# Altium PCB LDP_PWR_V2.0.PcbDoc
Units mil, origin at the board's own origin, x right, y up, seen from the top; angles counter-clockwise.
Board outline 2815 x 2985 mil, 2 copper layers (Top Layer, Bottom Layer); 91 components, 54 nets, 269 pads, 111 vias.
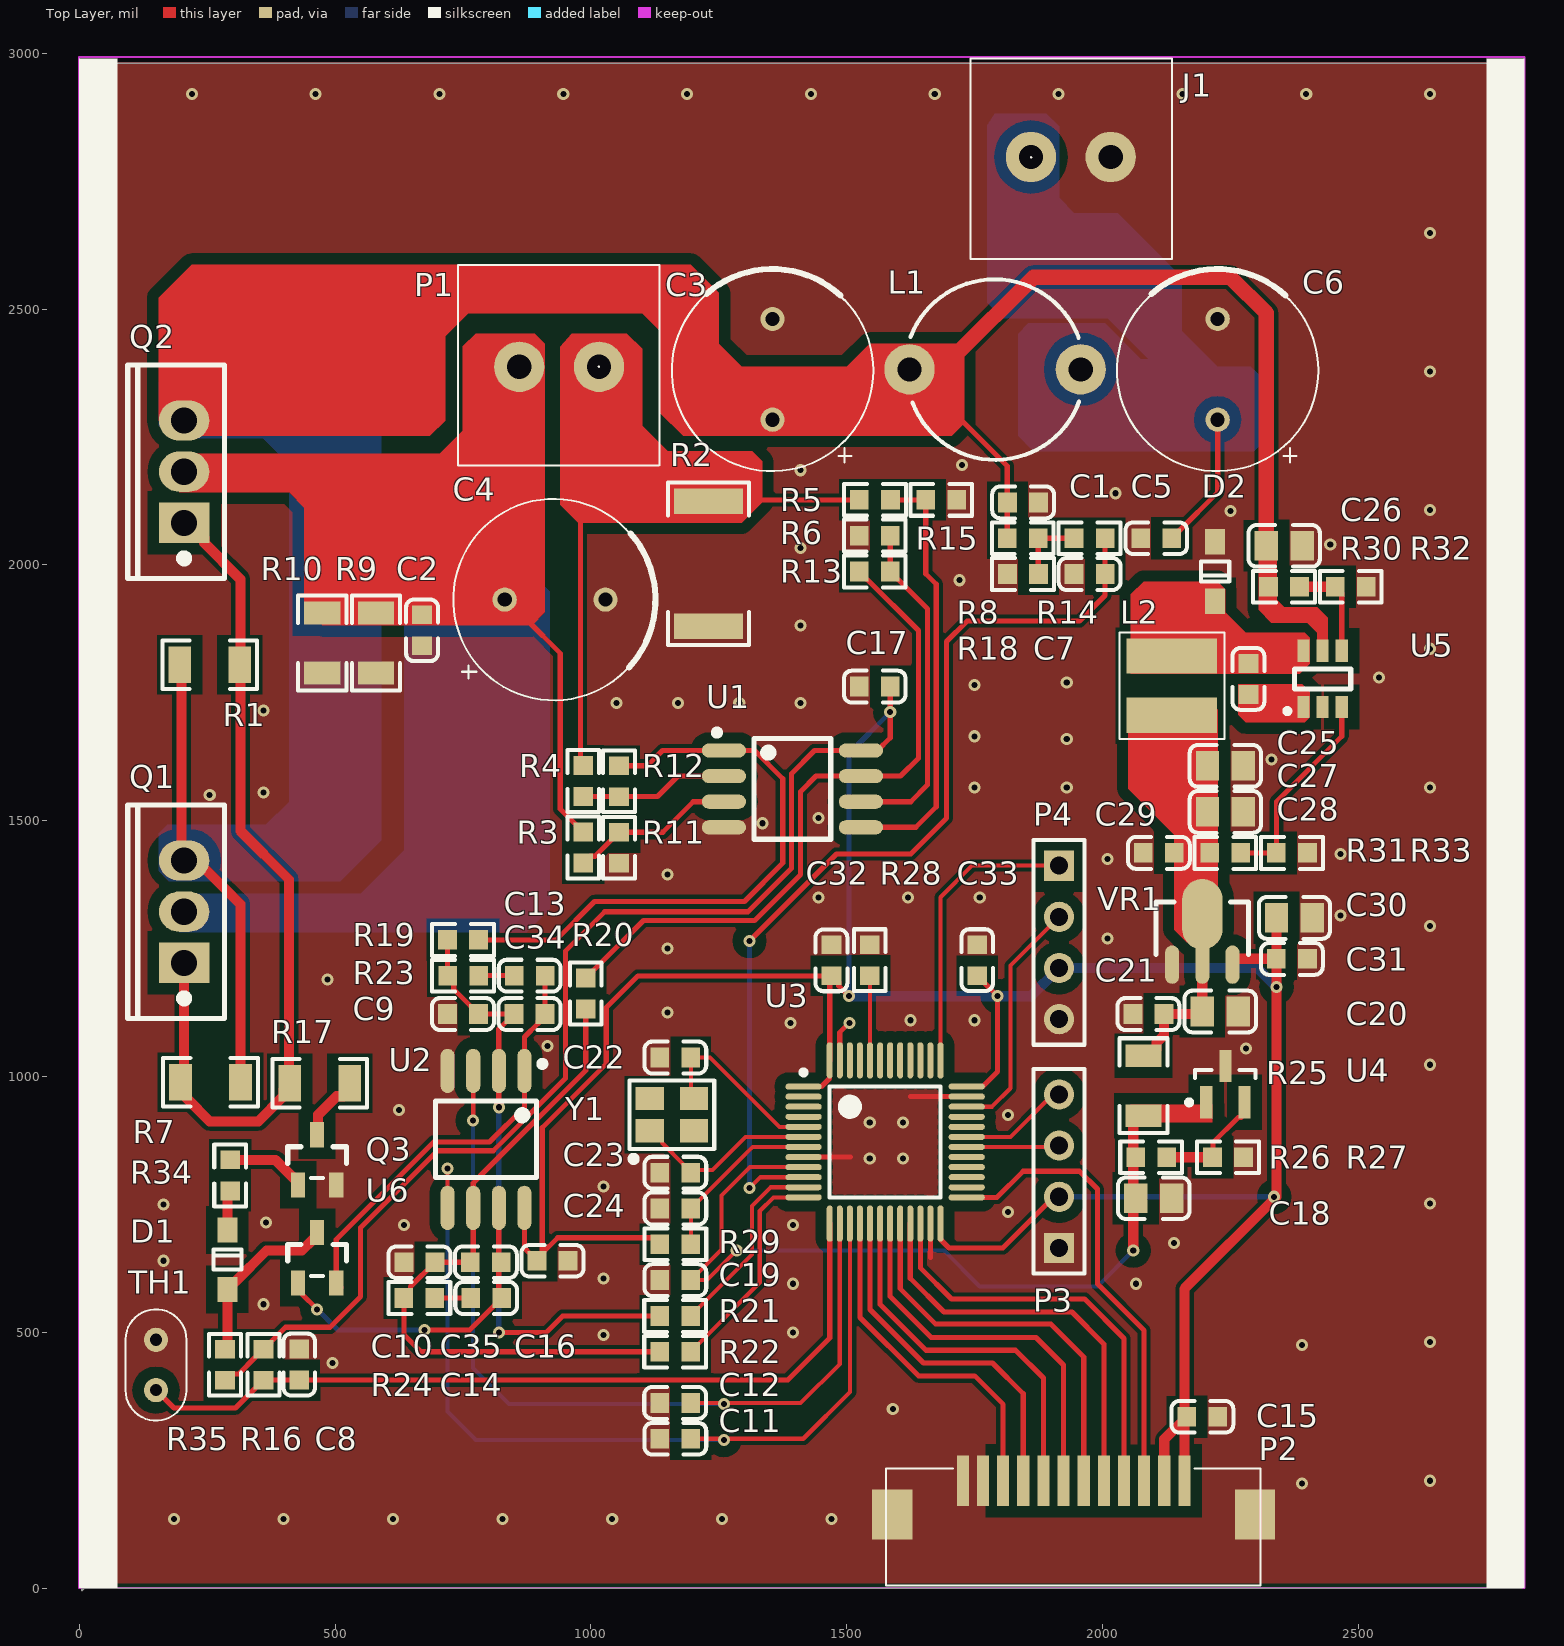
[diagram p0: Top Layer view]
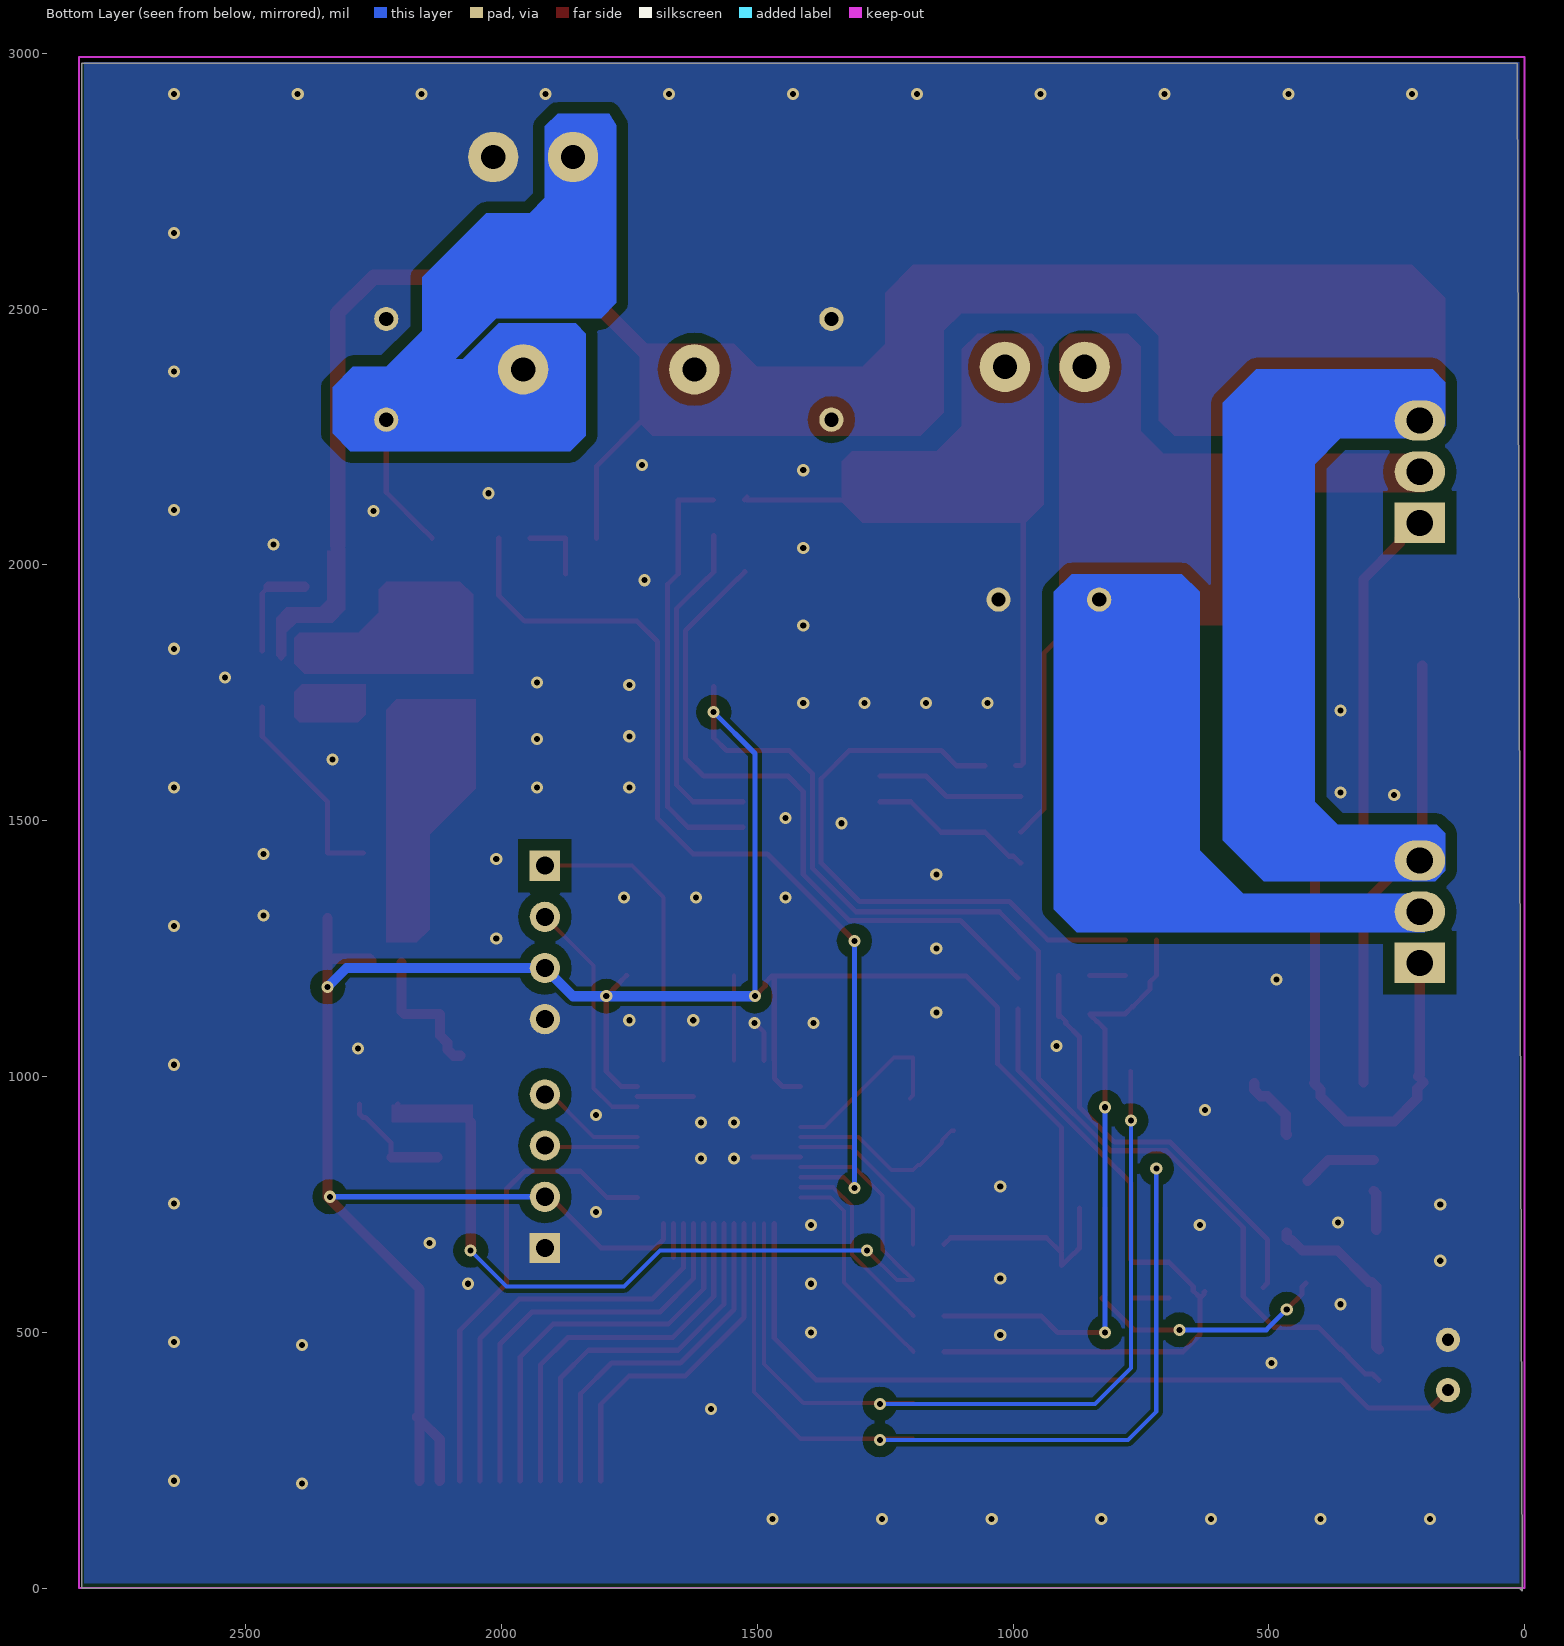
[diagram p1: Bottom Layer view, seen from below]
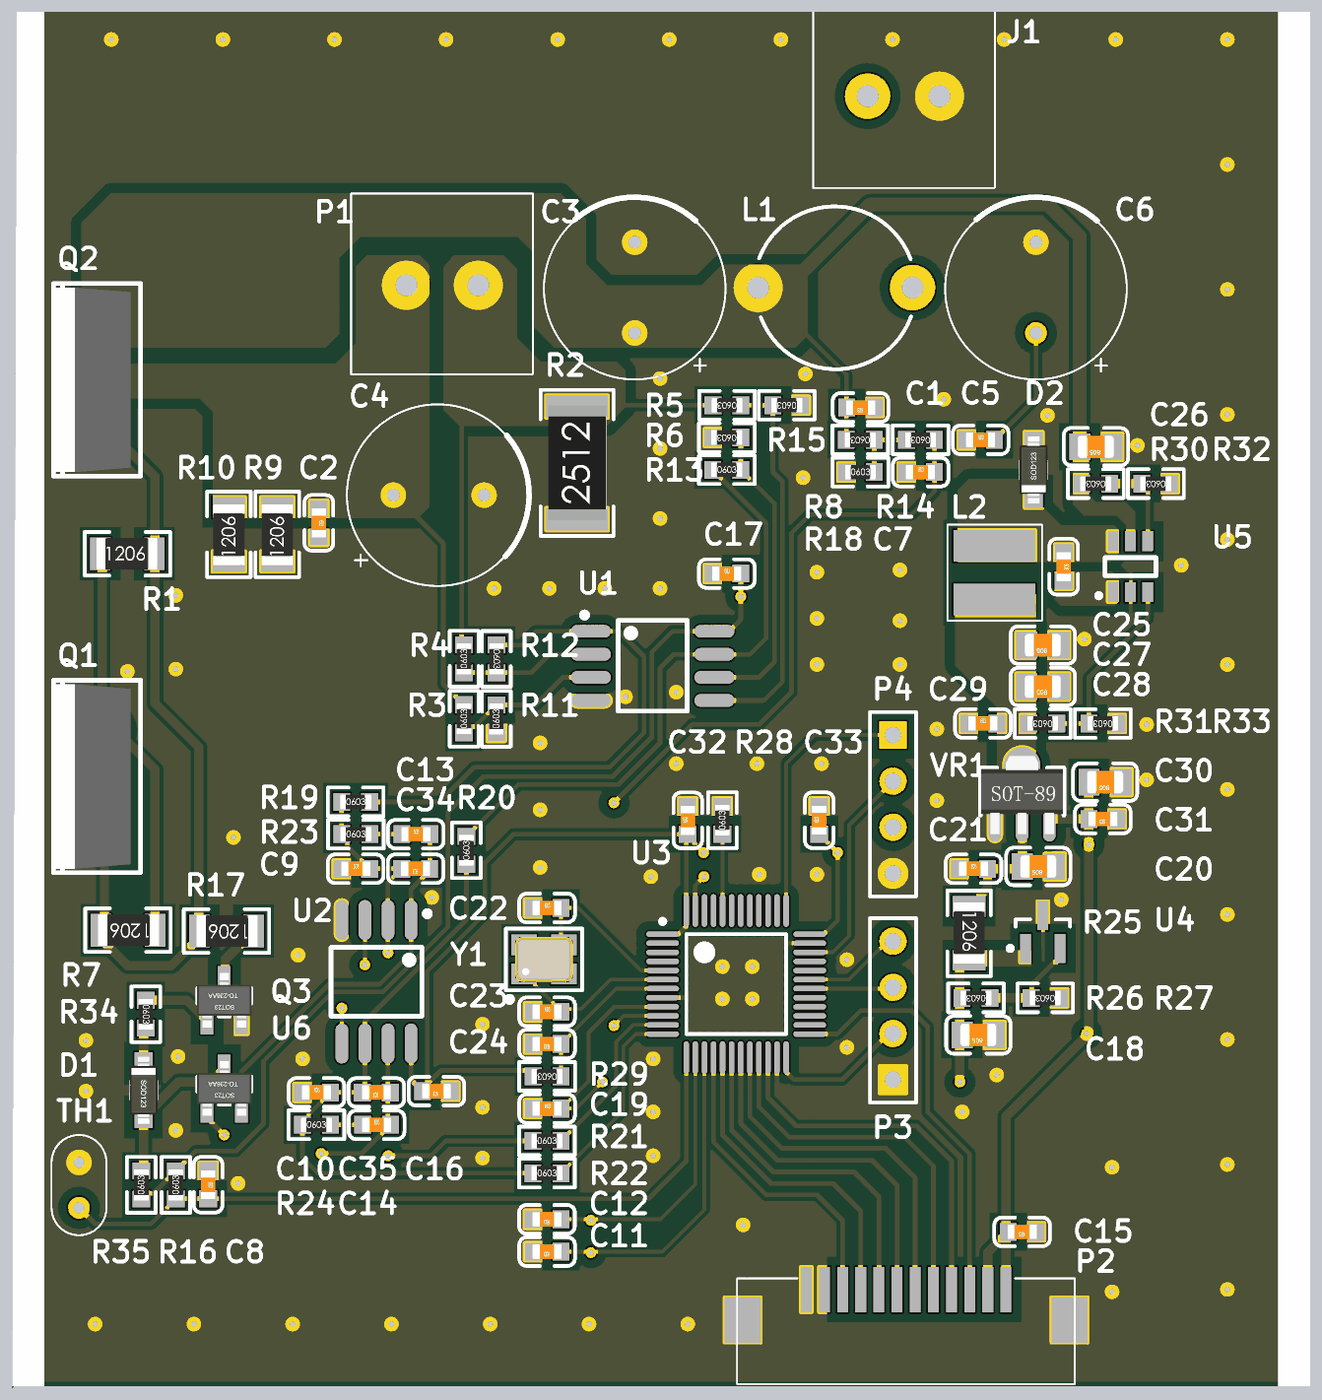
[diagram p2: 3D render of the assembled board from above, using the file's embedded part models]

## Layer stack, top to bottom
Top Solder: solder mask 0.4, Solder Resist, Dk 3.5
Top Layer: signal copper 1.4
Dielectric 1: dielectric 12.6, FR-4, Dk 4.8
Bottom Layer: signal copper 1.4
Bottom Solder: solder mask 0.4, Solder Resist, Dk 3.5

## Board outline
5,-5 10,0 2820,0 2820,2980 15,2980

## Design rules (kind name [scope] priority, off if disabled: settings)
Clearance [All] p1: gap=7 ignorepadtopadclearanceinfootprint=FALSE except(8: Arc-Fill Arc-Poly Arc-Region Track-Fill Track-Poly Track-Region; 22: SMDPad-Fill SMDPad-Poly SMDPad-Region THPad-Fill THPad-Poly THPad-Region Via-Fill Via-Poly Via-Region Fill-Fill Fill-Poly Fill-Region Poly-Poly Poly-Region Region-Region)
PlaneConnect [All] p1: planeconnectstyle=Direct reliefexpansion=20 reliefentries=4 reliefconductorwidth=10 reliefairgap=10
PolygonConnect [All] p1: connectstyle=Direct reliefconductorwidth=10 reliefentries=4 polygonreliefangle="90 Angle" airgapwidth=10
RoutingVias [All] p1: holewidth=28 width=50 viastyle="Through Hole" minholewidth=28 minwidth=50 maxholewidth=28 maxwidth=50
SolderMaskExpansion [All] p1: expansion=4
Width [All] p1: maxlimit=100 minlimit=8 preferedwidth=10 minimp=50.000000 maximp=50.000000 favimp=50.000000
29 further rules are at their usual default settings.

## Components (designator, comment, footprint, x,y, rotation, side; value= is the part's Value field where it differs from the comment)
C1 "100nF (104) 10% 50V" 0603_C 1844.69,2122.13 r180 top
C2 "10nF (103) 10% 50V" 0603_C 670,1872.13 r270 top
C3 "50V 470uF" CAP/DIP/10-5 1355,2382.13 r180 top value=220uF
C4 "50V 470uF" CAP/DIP/10-5 930,1932.13 r90 top locked value=220uF
C5 "100nF (104) 10% 50V" 0603_C 2105,2052.13 r0 top
C6 "50V 470uF" CAP/DIP/10-5 2225,2382.13 r180 top locked value=220uF
C7 "10nF (103) 10% 50V" 0603_C 1974.69,1982.13 r0 top
C8 "100nF (104) 10% 50V" 0603_C 430,437.13 r270 top
C9 "10nF (103) 10% 50V" 0603_C 750,1122.13 r0 top
C10 "10nF (103) 10% 50V" 0603_C 665,637.13 r0 top
C11 "10nF (103) 10% 50V" 0603_C 1165,292.13 r180 top
C12 "10nF (103) 10% 50V" 0603_C 1164.68,362.13 r180 top
C13 "680pF 10% 50V" 0603_C 880.32,1197.13 r0 top
C14 "6.8nF 10% 50V" 0603_C 795.32,567.13 r0 top
C15 "100nF (104) 10% 50V" 0603_C 2195,335 r180 top
C16 "100nF (104) 10% 50V" 0603_C 925,640 r180 top
C17 "100nF (104) 10% 50V" 0603_C 1554.68,1762.13 r0 top
C18 "10uF (106) 10% 25V" 0805_C 2100.04,762.13 r180 top
C19 "100nF (104) 10% 50V" 0603_C 1165,602.13 r0 top
C20 "10uF (106) 10% 25V" 0805_C 2230,1127.13 r180 top
C21 "100nF (104) 10% 50V" 0603_C 2089.69,1122.13 r0 top
C22 "12pF (120) 5% 50V" 0603_C 1165,1037.13 r0 top
C23 "12pF (120) 5% 50V" 0603_C 1165,812.13 r0 top
C24 "100nF (104) 10% 50V" 0603_C 1165,742.13 r180 top
C25 "100nF (104) 10% 50V" 0603_C 2285,1777.13 r270 top
C26 "10uF (106) 10% 25V" 0805_C 2354.96,2037.13 r180 top
C27 "10uF (106) 10% 25V" 0805_C 2240,1607.13 r180 top
C28 "10uF (106) 10% 25V" 0805_C 2240,1517.13 r180 top
C29 "100nF (104) 10% 50V" 0603_C 2110,1437.13 r0 top
C30 "10uF (106) 10% 25V" 0805_C 2375,1310 r180 top
C31 "100nF (104) 10% 50V" 0603_C 2370,1230 r180 top
C32 "100nF (104) 10% 50V" 0603_C 1470,1227.13 r90 top
C33 "100nF (104) 10% 50V" 0603_C 1755,1227.44 r90 top
C34 "1nF (102) 10% 50V" 0603_C 880,1122.13 r180 top
C35 "1nF (102) 10% 50V" 0603_C 794.68,637.13 r180 top
D1 "IN4148" SOD-123 290,642.13 r270 top
D2 "B5819W  SL" SOD-123 2220,1987.13 r90 top
J1 "OUT" CH3.96 2015.91,2797.13 r270 top
L1 "Inductor" L/DIP_6X25 1790,2382.13 r90 top locked value=10UH
L2 "10uH" "CD43 - duplicate" 2135,1822.13 r0 top
P1 "OUT" CH3.96 860,2387.13 r90 top locked
P2 "FPC12" FPC_12 1726.93,210 r270 top locked
P3 "UART1" HDR1X4 1915,665 r90 top locked
P4 "SWD" HDR1X4 1915,1412.13 r270 top locked
Q1 "IRFP9540" TO-220(TO-220-3) 205,1322.13 r90 top locked
Q2 "IRFP9540" TO-220(TO-220-3) 205,2182.13 r90 top locked
Q3 "2N7002 7002" SOT-23(SOT-23-3) 465,837.13 r270 top
R1 "10KΩ (1002) ±1%" 1206_R 255,1805 r0 top
R2 "0R05" 2512_R 1230,2002.13 r90 top locked value=0R2/1%
R3 "10KΩ (1002) ±1%" 0603_R 985,1447.44 r90 top
R4 "10KΩ (1002) ±1%" 0603_R 985,1577.44 r90 top
R5 "1KΩ (1001) ±1%" 0603_R 1555,2127.13 r180 top
R6 "1KΩ (1001) ±1%" 0603_R 1554.69,2057.13 r180 top
R7 "10KΩ (1002) ±1%" 1206_R 256.34,988.94 r180 top
R8 "10KΩ (1002) ±1%" 0603_R 1844.06,2052.13 r180 top
R9 "10KΩ (1002) ±1%" 1206_R 580,1847.13 r90 top
R10 "10KΩ (1002) ±1%" 1206_R 475,1847.13 r90 top
R11 "1KΩ (1001) ±1%" 0603_R 1055,1447.13 r90 top
R12 "1KΩ (1001) ±1%" 0603_R 1055,1577.13 r270 top
R13 "8.2KΩ (8201) ±1%" 0603_R 1554.68,1987.13 r0 top
R14 "1KΩ (1001) ±1%" 0603_R 1974.69,2052.13 r180 top
R15 "8.2KΩ (8201) ±1%" 0603_R 1684.69,2127.13 r180 top
R16 "1KΩ (1001) ±1%" 0603_R 360,436.81 r90 top
R17 "300Ω (3000) ±1%" 1206_R 470,987.13 r180 top
R18 "1KΩ (1001) ±1%" 0603_R 1844.37,1982.13 r0 top
R19 "1KΩ (1001) ±1%" 0603_R 750,1267.13 r0 top
R20 "1KΩ (1001) ±1%" 0603_R 990,1162.13 r90 top
R21 "1KΩ (1001) ±1%" 0603_R 1164.68,532.13 r0 top
R22 "1KΩ (1001) ±1%" 0603_R 1164.68,462.13 r0 top
R23 "1KΩ (1001) ±1%" 0603_R 750.31,1197.13 r0 top
R24 "1KΩ (1001) ±1%" 0603_R 664.68,567.13 r0 top
R25 "300Ω (3000) ±1%" 1206_R 2080,982.13 r270 top
R26 "3KΩ (3001) ±1%" 0603_R 2095,842.13 r180 top
R27 "9.1KΩ (9101) ±1%" 0603_R 2245,842.13 r180 top
R28 "100KΩ (1003) ±1%" 0603_R 1545,1227.44 r90 top
R29 "10KΩ (1002) ±1%" 0603_R 1165,672.13 r180 top
R30 "4.7KΩ (4701) ±1%" 0603_R 2354.69,1957.13 r180 top
R31 "5.6KΩ (5601) ±1%" 0603_R 2239.69,1437.13 r180 top
R32 "1KΩ (1001) ±1%" 0603_R 2485,1957.13 r180 top
R33 "1KΩ (1001) ±1%" 0603_R 2370,1437.13 r180 top
R34 "10Ω (10R0) ±1%" 0603_R 295,806.81 r270 top
R35 "4.7KΩ (4701) ±1%" 0603_R 285,436.81 r90 top
TH1 "NTC 10K" NTC_2.5MM 150,485.55 r0 top value=10K
U1 "SGM8582XS8G" SOIC-8_208mil 1393.86,1562.13 r270 top
U2 "SGM8582XS8G" SOIC-8_208mil 795,877.13 r180 top
U3 "STM32F071CBT6" STM-LQFP48_N 1575,872.13 r0 top locked
U4 "TL431AIDBZR" TI-DBZ3_N 2240,985 r90 top
U5 "MP2451DT-LF-Z" SOT-23-6 2430,1777.13 r270 top
U6 "BAW56" SOT-23(SOT-23-3) 465,645.79 r270 top
VR1 "HT7533-1" SOT-89(SOT-89-3) 2195,1218.7 r270 top
Y1 "8MHZ 10PPM" SMD-3225_4P 1158.31,925.63 r0 top

## Footprints (in the part's own frame and the unit in brackets; to place one, negate y for a bottom-side part, rotate by r counter-clockwise, add the part's x,y. Pads: shape width x height; smd on the part's side, far side on the other; paste and mask are expansions set on the pad)
0603_C [mm]
  rect 0.93x0.98 smd: 1(-0.77,0) 2(0.77,0)
  silkscreen extent -1.53,-0.79 1.54,0.79, body extent -0.8,-0.4 0.8,0.4, height 0.3
0603_R [mm]
  rect 0.93x0.98 smd: 1(-0.77,0) 2(0.77,0)
  silkscreen extent -1.53,-0.79 1.54,0.79, body extent -0.85,-0.4 0.85,0.4, height 0.56
0805_C [mm]
  rect 1.16x1.47 smd: 1(-0.89,0) 2(0.89,0)
  silkscreen extent -1.77,-1.04 1.77,1.04, body extent -1,-0.62 1,0.63, height 0.77
1206_R [mm]
  rect 1.13x1.8 smd: 1(-1.49,0) 2(1.49,0)
  silkscreen extent -2.36,-1.2 2.35,1.2, body extent -1.7,-0.86 1.65,0.87, height 0.85
2512_R [mm]
  rect 1.25x3.42 smd: 1(-3.1,0) 2(3.1,0)
  silkscreen extent -4.03,-2.01 4.02,2.01, body extent -3.16,-1.6 3.16,1.6, height 0.62
CAP/DIP/10-5 [mm]
  round 1.2 hole 0.7: 1(0,2.5) 2(0,-2.5)
  silkscreen extent -5,-4.98 5,5.06
"CD43 - duplicate" [mm]
  rect 4.5x1.75 smd: 1(0,0) 2(0,-2.95)
  silkscreen extent -2.59,-4.11 2.62,1.17
CH3.96 [mm]
  round 2.5 hole 1.2: 1(0,0) 2(0,-3.96)
  silkscreen extent -4.9,-6.96 5.05,3.05
FPC_12 [mm]
  rect 2.5x0.6 smd: 1(0,0) 2(0,1) 3(0,2) 4(0,3) 5(0,4) 6(0,5) 7(0,6) 8(0,7) 9(0,8) 10(0,9) 11(0,10) 12(0,11)
  rect 2.5x2 smd: 13(1.676,-3.5) 14(1.676,14.5)
  silkscreen extent -0.61,-3.81 5.21,14.78
HDR1X4 [mm] "Connector; Header; 4 Position"
  rect 1.5x1.5 hole 0.9: 1(0,0)
  round 1.5 hole 0.9: 2(2.54,0) 3(5.08,0) 4(7.62,0)
  silkscreen extent -1.27,-1.27 8.89,1.27
L/DIP_6X25 [mm]
  round 2.5 hole 1.2: 1(0,-4.25) 2(0,4.25)
  silkscreen extent -4.5,-4.17 4.47,4.2
NTC_2.5MM [mm]
  round 1.2 hole 0.6: 1(0,0) 2(0,-2.5)
  silkscreen extent -1.51,-4.01 1.51,1.51
SMD-3225_4P [mm]
  rect 1.4x1.15 smd: 1(-1.1,-0.8) 2(1.1,-0.8) 3(1.1,0.8) 4(-1.1,0.8)
  silkscreen extent -2.1,-2.35 2.1,1.7, body extent -1.6,-1.25 1.6,1.25, height 0.61
SOD-123 [mm]
  rect 1.25x1 smd: 1(1.475,0) 2(-1.475,0)
  silkscreen extent -0.5,-0.7 0.5,0.7, body extent -1.85,-0.77 1.85,0.78, height 1.35
SOIC-8_208mil [mm]
  oval 0.7x2.2 smd: 1(-1.905,-3.4) 2(-0.635,-3.4) 3(0.635,-3.4) 4(1.905,-3.4) 5(1.905,3.4) 6(0.635,3.4) 7(-0.635,3.4) 8(-1.905,3.4)
  silkscreen extent -2.95,-3.9 2.5,1.9
SOT-23(SOT-23-3) [mm]
  rect 1.25x0.7 smd: 1(1.25,-0.95) 2(1.25,0.95) 3(-1.25,0)
  silkscreen extent -0.65,-1.46 0.9,1.46, body extent -1.5,-1.5 1.5,1.5, height 1.3
SOT-23-6 [mm]
  rect 1.1x0.6 smd: 1(1.4,-0.95) 2(1.4,0) 3(1.4,0.95) 4(-1.4,0.95) 5(-1.4,0) 6(-1.4,-0.95)
  silkscreen extent -0.5,-1.87 1.72,1.4
SOT-89(SOT-89-3) [mm]
  oval 1.9x0.7 smd: 1(0,-1.5) 3(0,1.5)
  oval 3.5x2 smd: 2(-2.5,0)
  oval 2.1x0.7 smd: 2(-0.1,0)
  silkscreen extent -3.1,-2.3 -0.5,2.3, body extent -3.75,-2.25 0.55,2.25, height 1.51
STM-LQFP48_N [mm] "QFP, 48-Leads, Body 7x7mm, Pitch 0.5mm, IPC Medium Density"
  oval 1.8x0.3 smd: 1(-4.05,2.75) 2(-4.05,2.25) 3(-4.05,1.75) 4(-4.05,1.25) 5(-4.05,0.75) 6(-4.05,0.25) 7(-4.05,-0.25) 8(-4.05,-0.75) 9(-4.05,-1.25) 10(-4.05,-1.75) 11(-4.05,-2.25) 12(-4.05,-2.75) 25(4.05,-2.75) 26(4.05,-2.25) 27(4.05,-1.75) 28(4.05,-1.25) 29(4.05,-0.75) 30(4.05,-0.25) 31(4.05,0.25) 32(4.05,0.75) 33(4.05,1.25) 34(4.05,1.75) 35(4.05,2.25) 36(4.05,2.75)
  oval 0.3x1.8 smd: 13(-2.75,-4.05) 14(-2.25,-4.05) 15(-1.75,-4.05) 16(-1.25,-4.05) 17(-0.75,-4.05) 18(-0.25,-4.05) 19(0.25,-4.05) 20(0.75,-4.05) 21(1.25,-4.05) 22(1.75,-4.05) 23(2.25,-4.05) 24(2.75,-4.05) 37(2.75,4.05) 38(2.25,4.05) 39(1.75,4.05) 40(1.25,4.05) 41(0.75,4.05) 42(0.25,4.05) 43(-0.25,4.05) 44(-0.75,4.05) 45(-1.25,4.05) 46(-1.75,4.05) 47(-2.25,4.05) 48(-2.75,4.05)
  silkscreen extent -4.17,-2.75 2.75,3.57, body extent -3.5,-3.5 3.5,3.5, height 1.6
TI-DBZ3_N [mm] "SOT23, 3-Leads, Body 2.92x1.3 mm, Pitch 0.95 mm, IPC Medium Density"
  rect 1.6x0.6 smd: 1(-0.9,0.95) 2(-0.9,-0.95) 3(0.9,0)
  silkscreen extent -1.02,-1.5 0.7,1.92, body extent -0.7,-1.52 0.7,1.52, height 1.12
TO-220(TO-220-3) [mm]
  rect 2x2.5 hole 1.3: 1(-2.54,0)
  oval 2x2.5 hole 1.3: 2(0,0) 3(2.54,0)
  silkscreen extent -5.3,-2 5.3,2.8, body extent -5.08,-1.45 5.08,2.9, height 19.6

## Part data
C1 C5 C8 C15 C16 C17 C19 C21 C24 C25 C29 C31 C32 C33: library part "0603 100nF (104) 10% 50V", "贴片电容", Package=0603, SuppliersPartNumber=C14663, ComponentLink1Description=供应商, ComponentLink1URL=http://www.szlcsc.com/product/details_15331.html, Supplier=LC
C2 C7 C9 C10 C11 C12 C13 C14: library part "0603 10nF (103) 10% 50V", "贴片电容", Package=0603, SuppliersPartNumber=C57112, ComponentLink1Description=供应商, ComponentLink1URL=http://www.szlcsc.com/product/details_58143.html, Supplier=LC
C3 C4 C6: library part 07.0686, "Capacitor;400V;20%", Manufacture="Nippon Chemi-con", Manufacture_PN=EKXG401ELL470ML25S, Manufacturer={Manufacturer}, Manufacturer P/N="{Manufacturer P/N}", Package=DIP, Available_Num=67, EPR_Note=16*25脚距7., Note=47uF/400V, Out_Num=0, Part_Name=EKXG401ELL470ML25S, Part Number=07.0686, Pid=2107, Spec=Capacitor, Stock_Num=67
C18 C20 C26 C27 C28 C30: library part "0805 10uF (106) 10% 25V", "贴片电容", Package=0805, SuppliersPartNumber=C15850, ComponentLink1Description=供应商, ComponentLink1URL=http://www.szlcsc.com/product/details_16532.html, Supplier=LC
C22 C23: library part "0603 12pF (120) 5% 50V", "贴片电容", Package=0603, SuppliersPartNumber=C38523, ComponentLink1Description=供应商, ComponentLink1URL=http://www.szlcsc.com/product/details_39506.html, Supplier=LC
C34 C35: library part "0603 1nF (102) 10% 50V", "贴片电容", Package=0603, SuppliersPartNumber=C1588, ComponentLink1Description=供应商, ComponentLink1URL=http://www.szlcsc.com/product/details_1940.html, Supplier=LC
D1: library part Diode, "Default Diode", Code_JEDEC=DO-214-AB, LatestRevisionDate=17-Jul-2002, LatestRevisionNote="Re-released for DXP Platform.", PackageDescription="DO-214-AB/SMC; 2 C-Bend Leads; Body 7.9 x 5.9 mm, inc. leads (LxW)", PackageReference=SMC, PackageVersion=Sep-1996, Published=8-Jun-2000, Publisher="Altium Limited"
D2: library part "SOD-123 B5819W  SL", "肖特基二极管", Package=SOD-123, SuppliersPartNumber=C8598, ComponentLink1Description=供应商, ComponentLink1URL=http://www.szlcsc.com/product/details_9093.html, Supplier=LC
J1: library part PWR2.5, "Low Voltage Power Supply Connector", ComponentLink1Description="Manufacturer Link", ComponentLink1URL=http://domino.kycon.com/internet/Products.html, DatasheetDocument=09-May-2002, Published=17-Dec-2003, Publisher="Altium Limited"
L2: library part Inductor, "Inductor", Code_IEC=1005, Code_JEITA=0402, LatestRevisionDate=29-May-2009, LatestRevisionNote="IPC-7351 Footprint Added.", PackageDescription="Chip Inductor", PackageReference=0402-A, Published=8-Jun-2000, Publisher="Altium Limited"
P1: library part "Header 2", "Header, 2-Pin", LatestRevisionDate=17-Jul-2002, LatestRevisionNote="Re-released for DXP Platform.", Publisher="Altium Limited"
P2: library part "Header 12", "Header, 12-Pin", LatestRevisionDate=17-Jul-2002, LatestRevisionNote="Re-released for DXP Platform.", Publisher="Altium Limited"
P3 P4: library part "Header 4", "Header, 4-Pin", LatestRevisionDate=17-Jul-2002, LatestRevisionNote="Re-released for DXP Platform.", Publisher="Altium Limited"
Q1 Q2: library part MOSFET-P, "P-Channel MOSFET", LatestRevisionDate=17-Jul-2002, LatestRevisionNote="Re-released for DXP Platform.", PackageDescription="TO, Flat Index; 3 In-Line, Axial Leads; Body Dia. 4.6mm; Lead Dia. 0.5 mm (max)", PackageReference=E3, PackageVersion=1995/1996, Published=8-Jun-2000, Publisher="Altium Limited"
Q3: "MOS(场效应管)", Package=SOT-23(SOT-23-3), SuppliersPartNumber=C8545, ComponentLink1Description=供应商, ComponentLink1URL=http://www.szlcsc.com/product/details_9040.html, Supplier=LC
R1 R7 R9 R10: library part "1206 10KΩ (1002) 1%", "贴片电阻", Package=1206, SuppliersPartNumber=C17902, ComponentLink1Description=供应商, ComponentLink1URL=http://www.szlcsc.com/product/details_18590.html, Supplier=LC
R2: library part 06.0281, "Film Resistor;5%;", Manufacture_PN=0603SAJ0102T5E, Manufacturer=Yageo, Manufacturer P/N=9C06031A1203FKHFT, Package=0603, Available_Num=8849, Distributor=Digikey, Distributor P/N=311-120KHCT-ND, Out_Num=0, Part_Name=0603SAJ0102T5E, Part Number=06.0281, Pid=1965, Spec="Film Resistor", Stock_Num=8849
R3 R4 R8 R29: library part "0603 10KΩ (1002) 1%", "贴片电阻", Package=0603, SuppliersPartNumber=C25804, ComponentLink1Description=供应商, ComponentLink1URL=http://www.szlcsc.com/product/details_26547.html, Supplier=LC
R5 R6 R11 R12 R14 R16 R18 R19 R20 R21 R22 R23 R24 R32 R33: library part "0603 1KΩ (1001) 1%", "贴片电阻", Package=0603, SuppliersPartNumber=C21190, ComponentLink1Description=供应商, ComponentLink1URL=http://www.szlcsc.com/product/details_21904.html, Supplier=LC
R13 R15: library part "0603 8.2KΩ (8201) 1%", "贴片电阻", Package=0603, SuppliersPartNumber=C25981, ComponentLink1Description=供应商, ComponentLink1URL=http://www.szlcsc.com/product/details_26724.html, Supplier=LC
R17 R25: library part "1206 300Ω (3000) 1%", "贴片电阻", Package=1206, SuppliersPartNumber=C17887, ComponentLink1Description=供应商, ComponentLink1URL=http://www.szlcsc.com/product/details_18575.html, Supplier=LC
R26: library part "0603 3KΩ (3001) 1%", "贴片电阻", Package=0603, SuppliersPartNumber=C4211, ComponentLink1Description=供应商, ComponentLink1URL=http://www.szlcsc.com/product/details_4618.html, Supplier=LC
R27: library part "0603 9.1KΩ (9101) 1%", "贴片电阻", Package=0603, SuppliersPartNumber=C23260, ComponentLink1Description=供应商, ComponentLink1URL=http://www.szlcsc.com/product/details_23987.html, Supplier=LC
R28: library part "0603 100KΩ (1003) 1%", "贴片电阻", Package=0603, SuppliersPartNumber=C25803, ComponentLink1Description=供应商, ComponentLink1URL=http://www.szlcsc.com/product/details_26546.html, Supplier=LC
R30 R35: library part "0603 4.7KΩ (4701) 1%", "贴片电阻", Package=0603, SuppliersPartNumber=C23162, ComponentLink1Description=供应商, ComponentLink1URL=http://www.szlcsc.com/product/details_23889.html, Supplier=LC
R31: library part "0603 5.6KΩ (5601) 1%", "贴片电阻", Package=0603, SuppliersPartNumber=C23189, ComponentLink1Description=供应商, ComponentLink1URL=http://www.szlcsc.com/product/details_23916.html, Supplier=LC
R34: library part "0603 10Ω (10R0) 1%", "贴片电阻", Package=0603, SuppliersPartNumber=C22859, ComponentLink1Description=供应商, ComponentLink1URL=http://www.szlcsc.com/product/details_23586.html, Supplier=LC
TH1: library part Res2, "Resistor", LatestRevisionDate=17-Jul-2002, LatestRevisionNote="Re-released for DXP Platform.", PackageDescription="Axial Device, Thru-Hole; 2 Leads; 0.4 in Pin Spacing", PackageReference=AXIAL-0.4, Published=8-Jun-2000, Publisher="Altium Limited"
U1 U2: library part SGM8292XS8G, "运放", Package=SOT-23-5, SuppliersPartNumber=C7972, ComponentLink1Description=供应商, ComponentLink1URL=http://www.szlcsc.com/product/details_8449.html, Supplier=LC
U3: library part STM32F303CCT6, "ARM Cortex-M4 32-bit MCU, 256 KB Flash, 40 KB Internal RAM, 37 I/Os, 48-pin LQFP, -40 to 85 degC, Tray", I/Os (High Current)=37, Operating Frequency(F) (Processor speed) (MHz)=72, Supplier Part Number 1=497-13318-ND, Supply Voltage(Vcc) min (V)=2, ComponentLink1Description="Manufacturer URL", ComponentLink1URL=http://www.st.com/web/en/home.html, ComponentLink2Description=Datasheet, ComponentLink2URL=http://www.st.com/st-web-ui/static/active/en/resource/technical/document/datasheet/DM00058181.pdf, ComponentLink3Description="Package Specification", ComponentLink3URL=http://www.st.com/st-web-ui/static/active/en/resource/technical/document/datasheet/DM00058181.pdf, Core="ARM Cortex-M4", D/A Converter="2x12-bit (2 Channel)", DatasheetVersion="Rev. 6", FLASH Size (Prog) (kB)=256, Internal RAM Size (kB)=40, Mounting Technology="Surface Mount", PackageDescription="48-Pin Low Profile Quad Flat Package, 7 x 7 mm Body, 0.5 mm Pitch", PackageReference=LQFP48, PackageVersion="Rev. 6, 06/2013", Packing=Tray, PartNumber=STM32F303CCT6, Supplier 1=Digi-Key, Supplier 2=Newark, Supplier 3=Newark, Supplier 4=Mouser, Supplier Part Number 2=46W2192, Supplier Part Number 3=66W7286, Supplier Part Number 4=511-STM32F303CCT6
U4: "Adjustable Precision Shunt Regulator, 34 ppm / degC, 100 mA, -40 to 85 degC, 3-pin SOT-23 (DBZ), Green (RoHS & no Sb/Br)", Manufacturer="Texas Instruments", Rating=Catalog, Supplier Part Number 1=296-17329-2-ND, Temp Coeff(Max)(ppm/ degree C)=92, Temp Coeff(Typ)(ppm/ degree C)=34, Code_JEDEC=TO-236, ComponentLink1Description="Manufacturer URL", ComponentLink1URL=http://www.ti.com/, ComponentLink2Description=Datasheet, ComponentLink2URL=http://www.ti.com/general/docs/lit/getliterature.tsp?genericPartNumber=TL431A&fileType=pdf, ComponentLink3Description="Package Specification", ComponentLink3URL=http://www.ti.com/litv/pdf/mpds108a, DatasheetVersion=SLVS543M, Eco-Plan="Green (RoHS & no Sb/Br)", Initial Accuracy @ 25/deg C(%)=1, Iout/Iz(Max)(mA)=100, Min Iz for Regulation(uA)=600, Mounting Technology="Surface Mount", PackageDescription="3-Pin Plastic Small Outline, Body 2.92 x 1.3 mm, Pitch 0.95 mm", PackageReference=DBZ3, PackageVersion=4203227/B, PartNumber=TL431AIDBZR, SubFamily="Shunt Voltage Reference", Supplier 1=Digi-Key, Supplier 2=Digi-Key, Supplier 3=Digi-Key, Supplier 4=Farnell, Supplier 5=Newark, Supplier 6=Mouser, Supplier Part Number 2=296-17329-1-ND, Supplier Part Number 3=296-17329-6-ND, Supplier Part Number 4=1411108, Supplier Part Number 5=44J2371, Supplier Part Number 6=595-TL431AIDBZR, VO Adj(Max)(V)=36, VO Adj(Min)(V)=2.495
U5: library part MP2451DT-LF-Z_[C14123], "DC-DCоƬ", Package=SOT-23-6, SuppliersPartNumber=C14123, ComponentLink1Description=供应商, ComponentLink1URL=http://www.szlcsc.com/product/details_14780.html, Supplier=LC
VR1: library part "SOT-89 HT7533-1", "低压差线性稳压(LDO)", Package=SOT-89, SuppliersPartNumber=C14289, ComponentLink1Description=供应商, ComponentLink1URL=http://www.szlcsc.com/product/details_14949.html, Supplier=LC
Y1: library part "SMD-3225_4P  12MHZ 20PF 10PPM", "贴片晶振", Package=SMD-3225_4P, SuppliersPartNumber=C9002, ComponentLink1Description=供应商, ComponentLink1URL=http://www.szlcsc.com/product/details_9522.html, Supplier=LC
L1: Code_IEC=1005, Code_JEITA=0402, LatestRevisionDate=29-May-2009, LatestRevisionNote="IPC-7351 Footprint Added.", PackageDescription="Chip Inductor", PackageReference=0402-A, Published=8-Jun-2000, Publisher="Altium Limited"

## Via types
v1: diameter 23.62, hole 11.81, Top Layer to Bottom Layer, 111 vias

## Nets (pads, with @x,y where several pads share a name; then routed paths per layer and width w, separated by ;. In a path a pad name is that pad's centre, name@x,y a point inside that pad or via, vN(x,y) a via of type N, cw(c..) or ccw(c..) an arc to the next point about the centre after c; other vN are vias at no path point)
AVCC3V3: C18.2 C19.2 R25.2 R26.2 U3.9 U4.1 | length 1630.8
  Top Layer w8: v1(1285,660) 1227.13,602.13 C19.2 1195.32,603.11 1209.62,617.42 1210.61,617.42 1255,661.81 1255,767.13 1310.79,822.91 U3.9
  Top Layer w10: R25.2 R25.2@2083.27,920.2 ; U4.1@2195.79,920.2 2202.6,927.01 U4.1@2202.6,946.69
  Top Layer w20: v1(2060,660) 2060,911.22 2072.24,923.46 R25.2
  Bottom Layer w8: v1(1285,660) 1690,660 1760,590 1990,590 v1(2060,660)
BTN_ON: P2.3 U3.16 | length 683
  Top Layer w10: U3.16 1525.79,529.21 1640,415 1750,415 1805.67,359.33 P2.3
D/C: P2.9 U3.22 | length 819.8
  Top Layer w10: U3.22 1643.9,626.1 1705,565 1965,565 2041.89,488.11 P2.9
Driver_L: Q1.1 Q2.1 R1.2 R7.2 R17.2 | length 1705.8
  Top Layer w20: R7.2 209.92,976.69 209.92,957.2 254.96,912.17 350.04,912.17 399.09,961.22 399.09,974.88 R17.2@410,985.79 ; Q1.1 205,1004.45 R7.2@208.66,1000.79 ; Q2.1 214.84,2082.13 244.21,2052.76 244.21,2042.91 315,1972.13 315,1480 410,1385 R17.2@410,985.79 ; R17.2 R17.2@410,985.79
EC11_A: P2.6 U3.19 | length 763.2
  Top Layer w10: U3.19 1584.84,570.16 1665,490 1870,490 1923.78,436.22 P2.6
EC11_B: P2.5 U3.18 | length 737.4
  Top Layer w10: U3.18 1565.16,554.84 1655,465 1830,465 1884.41,410.59 P2.5
EC11_BTN: P2.4 U3.17 | length 705.8
  Top Layer w10: U3.17 1545.47,544.53 1650,440 1785,440 1845.04,379.96 P2.4
GND: C1.1 C2.2 C3.2 C4.2 C5.1 C6.2 C7.1 C8.1 C9.1 C10.1 C11.2 C12.2 C15.1 C16.1 C17.1 C18.1 C19.1 C20.1 C21.1 C22.1 C23.1 C24.2 C26.1 C27.1 C28.1 C29.1 C30.1 C31.1 C32.2 C33.2 D2.1 J1.1 P2.1 P2.2 P2.13 P2.14 P3.1 P4.4 Q3.2 R2.1 R6.2 R9.1 R10.1 R11.1 R15.1 R18.1 R27.1 R28.2 R32.1 R33.1 TH1.1 U1.4 U2.4 U3.8 U3.23 U3.35 U3.47 U4.3 U5.2 VR1.1 | length 349.6
  Top Layer w10: U3.8 1507.6,842.6 ; U3.47 1486.42,1086.42 v1(1505,1105) ; 1624.29,960.71 U3.35 ; 1663.58,646.42 U3.23
  other v1: 185,135 399.17,135 613.33,135 827.5,135 1041.67,135 1255.83,135 1470,135 2390,205 2640,210 1590,350 495,440 2390,475 2640,481 1025,495 1395,500 360,555 1395,595 2065,595 1025,605 165,640 2140,675 635,710 1395,710 365,715 1815,735 165,750 2640,752 1025,785 1545,840 1610,840 1545,910 1610,910 1815,925 625,935 2640,1023 2280,1055 915,1060 1390,1105 1625,1110 1750,1110 1150,1125 485,1190 1150,1250 2010,1270 2640,1294 2465,1315 1445,1350 1620,1350 1760,1350 1150,1395 2010,1425 2465,1435 1335,1495 1445,1505 255,1550 360,1555 1750,1565 1930,1565 2640,1565 2330,1620 1930,1660 1750,1665 360,1715 1050,1730 1170,1730 1290,1730 1410,1730 1750,1765 1930,1770 2540,1780 2640,1836 1410,1881.67 1720,1970 1410,2033.33 2445,2040 2250,2105 2640,2107 2025,2140 1410,2185 1725,2195 2640,2378 2640,2649 220,2920 462,2920 704,2920 946,2920 1188,2920 1430,2920 1672,2920 1914,2920 2156,2920 2398,2920 2640,2920
IOUT_FB: R22.2 U3.12 | length 428.1
  Top Layer w8: R22.2 1195,463.11 1209.31,477.42 1210.29,477.42 1330,597.13 1330,737.13 1356.73,763.86 U3.12
IREF: C11.1 U2.5 U3.15 | length 1849
  Top Layer w8: U2.5 720,715 v1(720,820) ; C11.1 1415,292.13 1506.1,383.23 U3.15
  Bottom Layer w8: v1(720,820) 720,345 775,290 v1(1260,290)
LCD_RST: P2.10 U3.25 | length 899
  Top Layer w10: U3.25 1793.86,763.86 1845,815 1955,815 1990,780 1990,595 2081.26,503.74 P2.10
MOSI: P2.7 U3.20 | length 783
  Top Layer w10: U3.20 1604.53,585.47 1674,516 1899,516 1963.15,451.85 P2.7
NetC2_1: C2.1 C4.1 P1.1 Q1.2 Q2.2 R3.2 R9.2 R10.2 | length 480.5
  Top Layer w10: 875,1912.13 875,1892.13 940,1827.13 940,1522.76 970.71,1492.05 970.71,1491.06 984.02,1477.76 R3.2
NetC5_2: C5.2 C6.1 J1.2 L1.1 | length 269.3
  Top Layer w10: C5.2 2135.31,2053.11 2148.62,2066.42 2149.61,2066.42 2225,2141.81 C6.1
NetC9_2: C9.2 C34.2 R19.1 R21.1 R23.1 U2.2 | length 1202.7
  Top Layer w10: R19.1 719.69,1197.44 R23.1 732.06,1185.06 732.06,1170.38 766.02,1136.42 767.01,1136.42 780.32,1123.11 C9.2 C34.2 849.68,1121.14 836.38,1107.83 835.39,1107.83 820,1092.44 U2.2 v1(820,940) ; v1(820,500) 912.87,500 945,532.13 R21.1
  Bottom Layer w10: v1(820,500) v1(820,940)
NetC10_2: C10.2 C35.2 R20.1 R22.1 R24.1 U2.6 | length 1354.7
  Top Layer w10: R24.1@625,580 626.5,578.5 626.5,575 R24.1 ; R20.1 990,1011.92 796.21,818.13 796,818.13 770,792.13 U2.6 770,642.76 C35.2 C10.2 647.68,589.49 647.68,581.42 634.37,568.11 R24.1 ; R22.1 667.87,462.13 634.37,495.63 R24.1
NetC13_1: C13.1 R23.2 | length 69.4
  Top Layer w10: R23.2 C13.1
NetC13_2: C13.2 C34.1 U2.1 U6.2 | length 848.1
  Top Layer w10: U6.2@511.18,587.8 U6.2 502.4,681.44 692.96,872 802,872 870,940 U2.1 870,1077.13 897.01,1104.13 897.01,1107.83 906.93,1117.76 910.63,1117.76 C13.2
NetC14_1: C14.1 R24.2 | length 70
  Top Layer w10: R24.2 C14.1
NetC14_2: C14.2 C35.1 U2.7 U6.1 | length 649
  Top Layer w10: U6.1 435.31,588.86 435.31,574.69 v1(465,545) ; v1(675,505) 763.5,505 811.34,552.83 812.32,552.83 825.63,566.14 C14.2 820,572.76 U2.7
  Bottom Layer w10: v1(465,545) 505,505 v1(675,505)
NetC22_2: C22.2 U3.5 Y1.3 | length 359
  Top Layer w8: Y1.3 1195.32,963.43 C22.2 1232.87,1037.13 1368.35,901.65 U3.5
NetC23_2: C23.2 U3.6 Y1.1 | length 361.7
  Top Layer w8: Y1.1 1119.92,894.13 1138.56,875.5 1138.56,870.57 1181.72,827.42 1186.01,827.42 1195.69,817.73 1237.73,817.73 1301.97,881.97 U3.6
NetC24_1: C24.1 R29.1 U3.7 | length 340
  Top Layer w8: R29.1 C24.1 1315.47,862.28 U3.7
NetC25_1: C25.1 D2.2 L2.1 U5.6
NetC25_2: C25.2 U5.1
NetD1_1: D1.1 R35.2 U6.3 | length 349.2
  Top Layer w20: R35.2 290,472.13 D1.1 290,588.98 299.69,598.66 304.61,598.66 365.95,660 435,660 455.39,680.39 461.22,680.39 465,684.17 U6.3
NetD1_2: D1.2 R34.2 | length 78.4
  Top Layer w20: D1.2 290,771.5 R34.2
NetP1_2: P1.2 R2.2 R4.2 R5.2 | length 723.6
  Top Layer w10: 980,2107.13 980,1612.13 984.37,1607.76 R4.2@995,1607.76 ; 1315,2127.13 R5.2@1519.68,2127.13 ; R5.2@1519.68,2132.13 R5.2
NetP3_1: P3.4 U3.31 | length 220
  Top Layer w8: U3.31 1819.84,881.97 P3.4@1915,977.13
NetP3_2: P3.3 U3.30 | length 181.7
  Top Layer w8: U3.30 1912.28,862.28 P3.3
NetP4_3: P4.1 U3.37 | length 576.1
  Top Layer w8: U3.37 1683.27,1350.39 1745,1412.13 P4.1
NetP4_4: P4.2 U3.34 | length 474.9
  Top Layer w8: U3.34 1783.9,941.02 1820,977.13 1820,1217.13 P4.2
NetQ3_1: Q3.1 R34.1 | length 146.1
  Top Layer w20: R34.1 383.39,837.13 Q3.1@424.19,796.32
NetQ3_3: Q3.3 R17.1 | length 134.9
  Top Layer w20: Q3.3 466.84,888.18 466.84,925.31 503.23,961.69 516.42,961.69 528.66,973.94 R17.1
NetR3_1: R3.1 R11.2 U1.3 | length 324.7
  Top Layer w10: R3.1 985.98,1417.13 999.29,1430.43 1007.99,1430.43 R11.2 1140.32,1477.44 1200,1537.13 U1.3
NetR4_1: R4.1 R12.2 U1.2 | length 291.6
  Top Layer w10: R4.1 1130,1547.13 1170,1587.13 U1.2
NetR5_1: R5.1 R15.2 U1.5 | length 841.5
  Top Layer w10: U1.5 1635,1487.13 1675,1527.13 1675,1962.13 1654.37,1982.76 R15.2 R5.1
NetR6_1: R6.1 R13.2 U1.6 | length 661.8
  Top Layer w10: U1.6 1625,1537.13 1658,1570.13 1658,1914.13 1599.29,1972.83 1598.31,1972.83 1585,1986.14 R13.2 R6.1
NetR8_1: R8.1 R14.2 R18.2 | length 140.1
  Top Layer w10: R18.2 1874.37,1982.44 R8.1 R14.2
NetR12_1: R12.1 R19.2 U1.1 | length 1176.9
  Top Layer w10: R19.2 932.13,1267.13 1007.13,1342.13 1300,1342.13 1375,1417.13 1375,1582.13 1320,1637.13 U1.1 1140,1637.13 1110.31,1607.44 R12.1
NetR13_1: R13.1 R20.2 U1.7 | length 1337
  Top Layer w10: R20.2 990.98,1192.44 1004.29,1205.75 1004.29,1206.73 1102.56,1305 1320,1305 1410,1395 1410,1557.13 1440,1587.13 U1.7 1605,1587.13 1640,1622.13 1640,1871.5 1538.66,1972.83 1537.68,1972.83 1524.37,1986.14 R13.1
NetR26_1: R26.1 R27.2 U4.2 | length 223.1
  Top Layer w10: R27.2 2215.56,843 2215.56,870.56 2265.2,920.2 2270.59,920.2 2277.4,927.01 U4.2@2277.4,946.69
  Top Layer w20: R26.1 R27.2
NetR28_1: R28.1 U3.44 | length 165.7
  Top Layer w8: R28.1 1545.47,1196.65 U3.44
NetR30_1: R30.1 R32.2 U5.4 | length 199.8
  Top Layer w10: R32.2 2467.4,1944.41 U5.4
  Top Layer w20: R30.1 R32.2
NetR31_1: R31.1 R33.2 U5.3 | length 407.5
  Top Layer w10: R31.1 R33.2 2339.68,1537.13 2467.4,1664.84 U5.3
SCK: P2.8 U3.21 | length 805.8
  Top Layer w10: U3.21 1624.21,605.79 1690,540 1940,540 2002.52,477.48 P2.8
TEMP: C8.2 R16.1 TH1.2 U3.13 | length 1612.3
  Top Layer w10: TH1.2 185,352.13 305.63,352.13 345.71,392.2 345.71,393.19 359.33,406.81 C8.2 1384.68,406.81 1466.73,488.86 U3.13
VBUS: C1.2 C3.1 C26.2 L1.2 Q1.3 Q2.3 R1.1 R7.1 R8.2 R30.2 U5.5 | length 2644.9
  Top Layer w10: 1720,2287.13 1813.74,2193.39 R8.2
  Top Layer w20: Q1.3@200,1427.13 R1.1@200,1802.68 ; Q1.3 230,1422.13 315,1337.13 R7.1 ; Q2.3 208.66,2285.79 370,2285.79 ; 1680,2322.13 1690,2332.13 1690,2387.13 1710,2407.13 ; R30.2 C26.2@2324.37,2037.13
  Top Layer w30: 1710,2407.13 1865,2562.13 2250,2562.13 2319.92,2492.2 C26.2
VCC: 
VCC3V3: C15.2 C16.2 C17.2 C30.2 C31.2 C32.1 C33.1 P2.11 P2.12 P3.2 P4.3 R16.2 R29.2 R35.1 U1.8 U2.8 U3.1 U3.24 U3.36 U3.48 VR1.3 | length 7843.4
  Top Layer w10: R35.1 297.22,418.72 311.59,418.72 345.71,452.83 345.71,453.82 359.02,467.13 R16.2 360.98,467.13 374.29,480.43 374.29,481.42 402.87,510 490,510 550,570 550,705 700,855 809.04,855 950,995.96 950,1245 1027,1322 1307,1322 1392,1407 1392,1592 1437.13,1637.13 U1.8 1560,1637.13 1585,1662.13 v1(1585,1712.13) C17.2 ; U2.8 870,664.69 880.39,654.29 881.38,654.29 905,630.67 905,655 935,685 1121.81,685 R29.2 ; 905,660 905,900 1030,1025 1030,1135 1091.81,1196.81 C32.1 ; U3.1 1415.9,980.74 1450.74,980.74 1466.39,996.39 1466.39,1031.23 U3.48 1466.73,1193.54 C32.1 ; v1(1504.45,1157.13) 1484.29,1177.29 1484.29,1183.5 1470.98,1196.81 C32.1 ; U3.24 1683.27,681.73 1700,665 1805,665 1905,765 P3.2 ; U3.36 1734.8,980.74 1765.74,980.74 1795,1010 v1(1795,1157.13) 1769.29,1182.83 1769.29,1183.82 1755.98,1197.13 C33.1
  Top Layer w20: P2.11 2120.63,290.94 2155.39,325.71 2156.38,325.71 C15.2@2160,329.33 ; P2.12 C15.2@2160,329.33 ; C15.2 2164.69,334.02 C15.2@2160,329.33 ; VR1.3 2254.06,1226.51 2257.55,1230 C31.2 ; C30.2 2339.69,1309.72 C31.2 ; C15.2@2160,329.33 2160,585 2339.69,764.69 v1(2339.69,1175) C31.2
  Bottom Layer w10: v1(1504.45,1157.13) 1504.45,1631.58 v1(1585,1712.13) ; P3.2 v1(2335,765)
  Bottom Layer w20: v1(1504.45,1157.13) v1(1795,1157.13) 1860,1157.13 P4.3 2302.56,1212.13 v1(2339.69,1175)
VCC5V: C20.2 C21.2 C27.2 C28.2 C29.2 L2.2 R25.1 R31.2 VR1.2 | length 278.2
  Top Layer w20: R25.1 2093.19,1040.79 2105.43,1053.03 2105.43,1066.22 2120,1080.79 C21.2 2189.96,1122.13 C20.2 C20.2 VR1.2@2195,1222.64
VIN_FB: C7.2 R14.1 U3.10 | length 1886
  Top Layer w8: v1(1310,782.13) 1331.1,803.23 U3.10
  Top Layer w10: v1(1310,1265) 1480,1435 1625,1435 1695,1505 1695,1850 1735,1890 1955,1890 2005,1940 C7.2 R14.1
  Bottom Layer w10: v1(1310,782.13) v1(1310,1265)
VOUT_FB: R21.2 U3.11 | length 380.9
  Top Layer w8: R21.2 1195,533.11 1209.31,547.42 1210.29,547.42 1315,652.13 1315,747.13 1351.42,783.54 U3.11
VREF: C12.1 U2.3 U3.14 | length 1697.4
  Top Layer w8: v1(769.69,913.91) 770,914.23 U2.3 ; C12.1 1410,362.13 1486.42,438.54 U3.14
  Bottom Layer w8: v1(769.69,913.91) 769.69,430.31 840,360 v1(1260,360)
pads on no net: U3.2 U3.3 U3.4 U3.26 U3.27 U3.28 U3.29 U3.32 U3.33 U3.38 U3.39 U3.40 U3.41 U3.42 U3.43 U3.45 U3.46 Y1.2 Y1.4

## Polygon pours and split planes (outlines as drawn)
GND on Bottom Layer (solid, pour order 10): 0,2992.13 2825,2992.13 2825,0 0,0
no net on Bottom Layer "Bottom Layer-No Net" (solid, pour order 6): 0,3000
GND on Top Layer (solid, remove dead copper, pour order 12): 0,2992.13 2825,2992.13 2825,0 0,0

## Keep-outs
Keep-Out Layer:
  lines w3.94: 0,0 2825,0 2825,2992.13 0,2992.13 0,0

## Other copper
Top Layer:
  rectangle net AVCC3V3: 2055,910 2215,945
  region net VCC5V: 2050,1737.13 2050,1562.13 2140,1472.13 2140,1287.13 2165,1262.13 2225,1262.13 2225,1717.13 2205,1737.13
  region net NetC25_2: 2265,1767.13 2390,1767.13 2405,1752.13 2405,1702.13 2395,1692.13 2280,1692.13 2265,1707.13
  region net NetC25_1: 2055,1787.13 2385,1787.13 2405,1807.13 2405,1857.13 2395,1867.13 2280,1867.13 2240,1907.13 2240,1952.13 2225,1967.13 2080,1967.13 2055,1942.13
  region net VBUS: 2305,2032.13 2305,1912.13 2330,1887.13 2400,1887.13 2420,1867.13 2420,1822.13 2430,1812.13 2440,1822.13 2440,1897.13 2420,1917.13 2355,1917.13 2340,1932.13 2340,2027.13
  region net VBUS: 1345,2387.13 1500,2387.13 1545,2432.13 1725,2432.13 1730,2427.13 1730,2277.13 1705,2252.13 1390,2252.13 1365,2277.13
  region net NetC2_1: 190,2217.13 705,2217.13 750,2262.13 750,2427.13 775,2452.13 890,2452.13 910,2432.13 910,1907.13 885,1882.13 475,1882.13 440,1917.13 440,2112.13 410,2142.13 195,2142.13
  region net VBUS: 173.75,2252.13 685,2252.13 715,2282.13 715,2447.13 760,2492.13 1100,2492.13 1135,2457.13 1135,2297.13 1180,2252.13 1390,2252.13 1420,2282.13 1420,2292.13 1420,2362.13 1395,2387.13 1295,2387.13 1250,2432.13 1250,2532.13 1195.6,2586.54 219.41,2586.54 155,2522.13 155,2282.13
  region net NetP1_2: 940,2426.29 940,2117.13 975,2082.13 1294.65,2082.13 1335,2122.48 1335,2202.13 1315,2222.13 1150,2222.13 1100,2272.13 1100,2422.13 1070,2452.13 962.14,2452.13
Bottom Layer:
  region net NetC2_1: 195,1357.13 550,1357.13 635,1442.13 635,1947.13 670,1982.13 885,1982.13 920,1947.13 920,1327.13 875,1282.13 855,1282.13 195,1282.13
  region net VBUS: 180,2247.13 360,2247.13 410,2197.13 410,1537.13 365,1492.13 172.13,1492.13 155,1475 155,1402.13 175,1382.13 510,1382.13 590,1462.13 590,2317.13 525,2382.13 180,2382.13 155,2357.13 155,2272.13
  region net NetC5_2: 2155,2222.13 1865,2222.13 1835,2252.13 1835,2452.13 1855,2472.13 2005,2472.13 2075,2402.13 2150,2402.13 2185,2367.13
  region net NetC5_2: 1775,2859.13 1775,2512.13 1805,2482.13 2010,2482.13 2095,2397.13 2095,2282.13 2155,2222.13 2295,2222.13 2330,2257.13 2330,2347.13 2290,2387.13 2225,2387.13 2155,2457.13 2155,2562.13 2030,2687.13 1945,2687.13 1915,2717.13 1915,2857.13 1890,2882.13 1789.37,2882.13

## Silkscreen, mask and mechanical layers (free items; w line width, h text height)
Top Overlay:
  rectangle: 2750,0 2825,2990
  rectangle: 0,0 75,2990